# Altium PCB Planar_HB_2.PcbDoc
Units mm, origin at the board's own origin, x right, y up, seen from the top; angles counter-clockwise.
Board outline 20.05 x 34.23 mm, 4 copper layers (Layer 1, Layer 2, Layer 3, Layer 4), stack 0.603 mm thick; 6 components, 5 nets, 22 pads, 6 vias.
Unrouted connection lines stored in the file: 10.
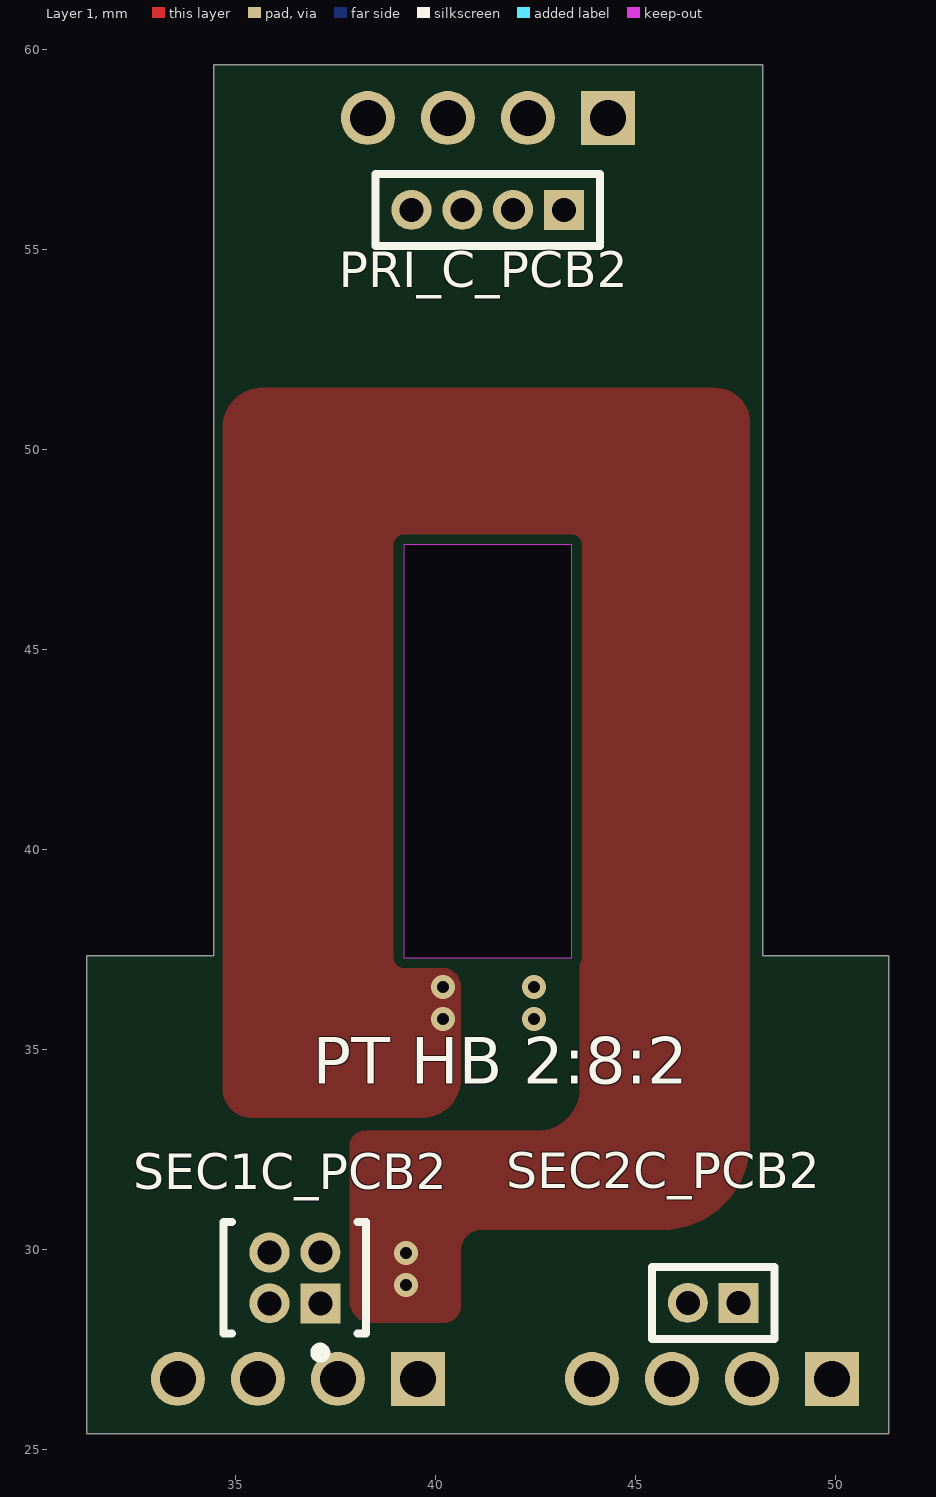
[diagram p0: Layer 1 view]
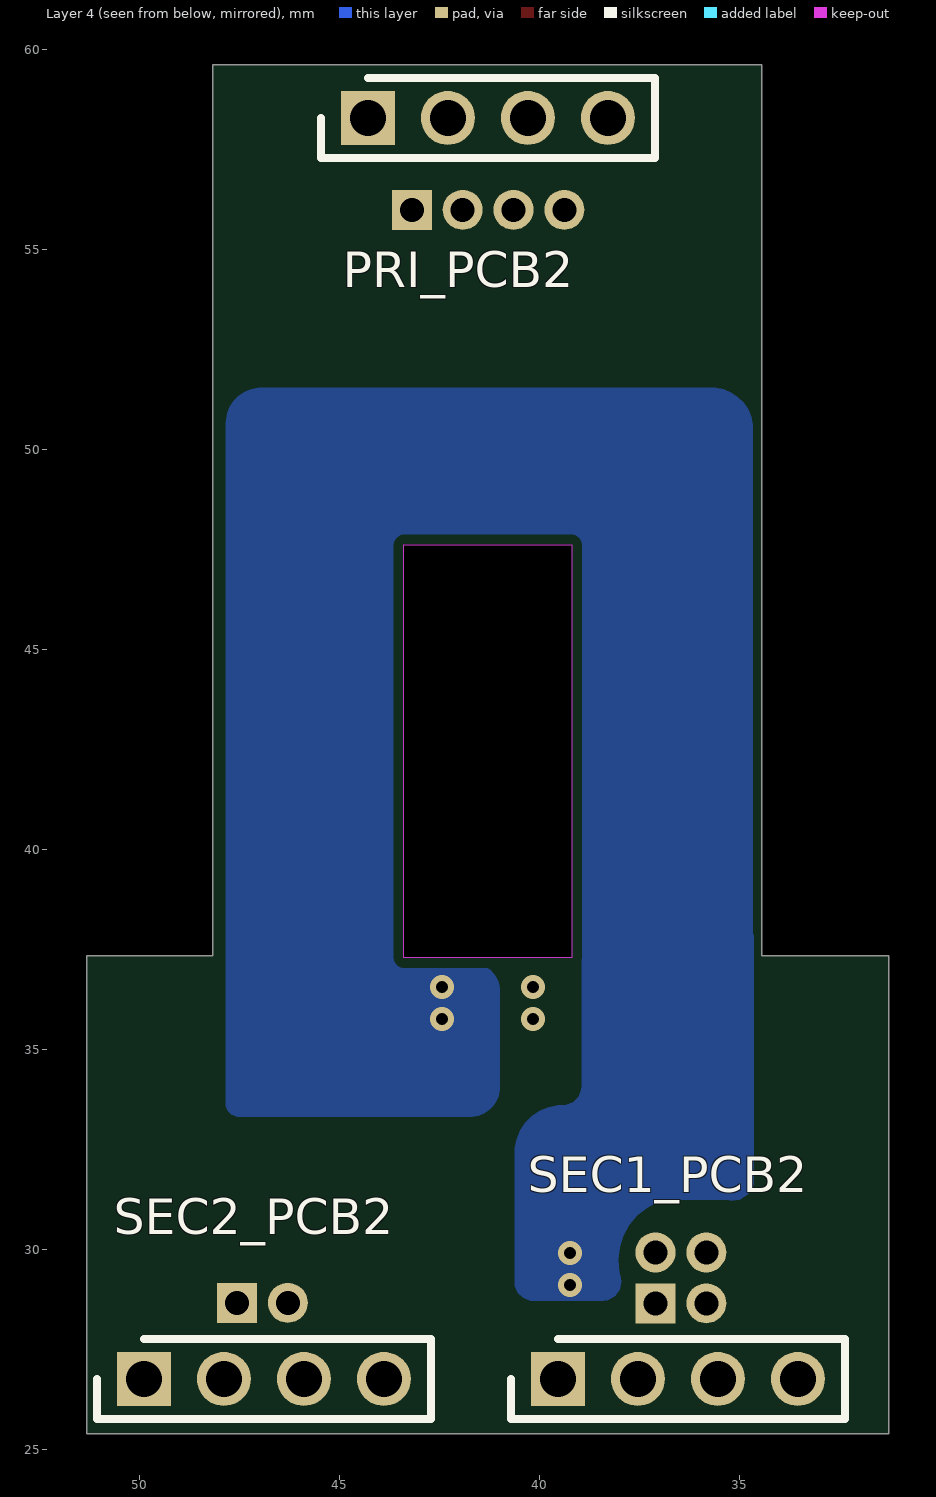
[diagram p1: Layer 4 view, seen from below]
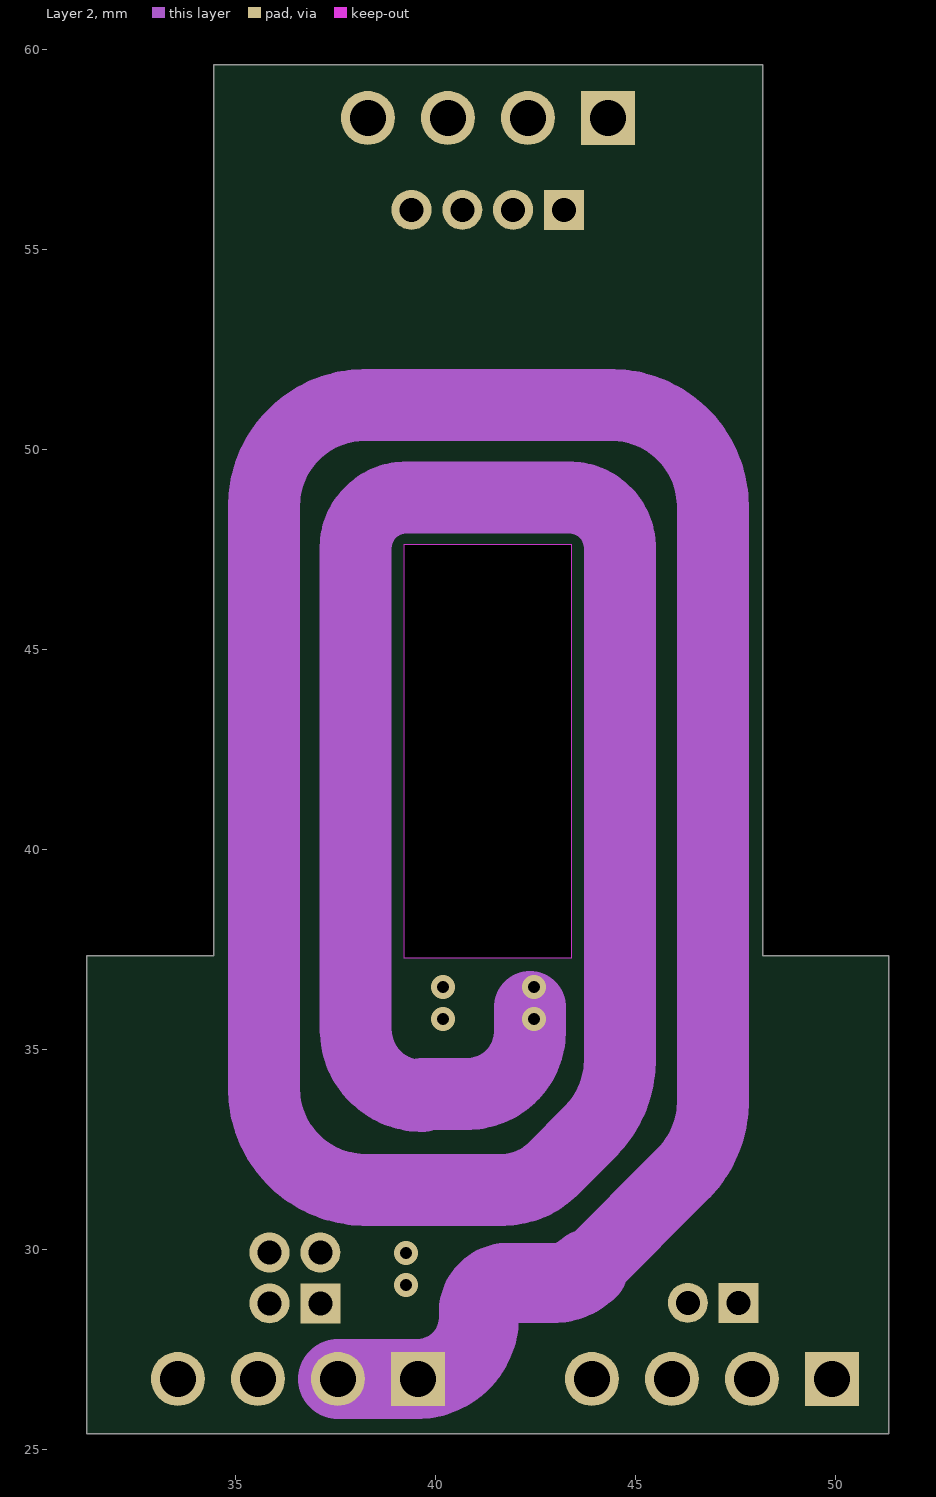
[diagram p2: Layer 2]
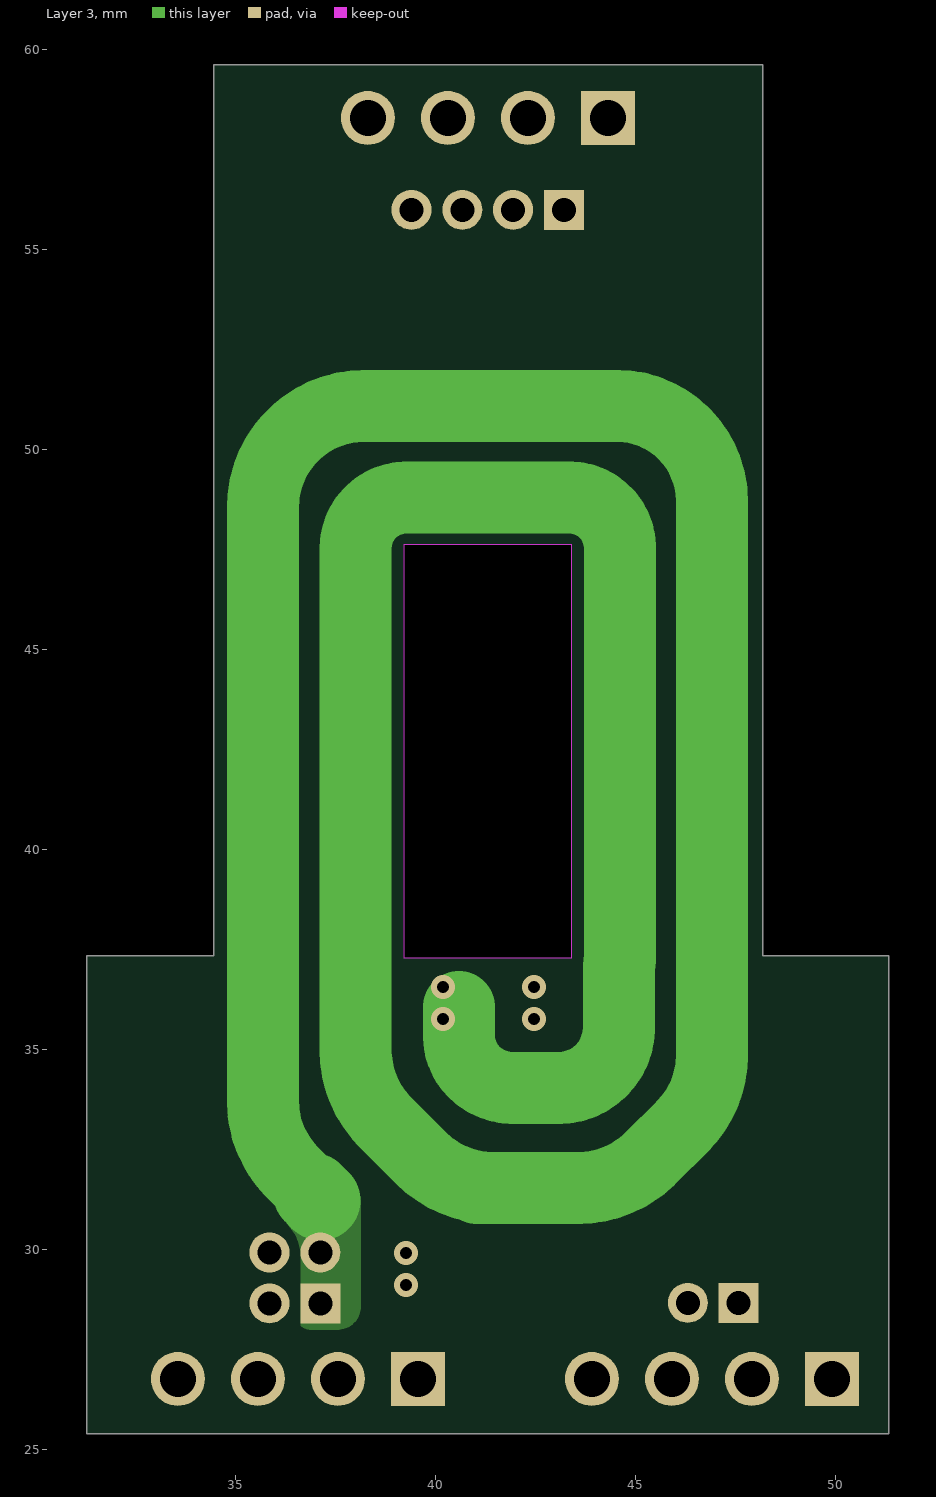
[diagram p3: Layer 3]

## Layer stack, top to bottom
Top Solder: solder mask 0.0102, Solder Resist, Dk 3.5
Layer 1: signal copper 0.0356
Dielectric 2: prepreg 0.0711, PP-006, Dk 4.1
Layer 2: signal copper 0.035
Dielectric 1: dielectric 0.32, FR-4, Dk 4.8
Layer 3: signal copper 0.035
Dielectric 3: prepreg 0.0711, PP-006, Dk 4.1
Layer 4: signal copper 0.0356
Bottom Solder: solder mask 0.0102, Solder Resist, Dk 3.5

## Board outline
31.275,25.4 31.275,37.35 34.45,37.35 34.45,59.625 48.175,59.625 48.175,37.35 51.325,37.35 51.325,25.4
cut-out: 39.2,47.625 39.2,37.3 43.4,37.3 43.4,47.625

## Design rules (kind name [scope] priority, off if disabled: settings)
Clearance [All] p1: gap=0.254 ignorepadtopadclearanceinfootprint=FALSE except(0: Arc-Hole Track-Hole SMDPad-Hole THPad-Hole Via-Hole Fill-Hole Poly-Hole Region-Hole Text-Hole)
PlaneConnect [All] p1: planeconnectstyle=Direct reliefexpansion=0.508 reliefentries=4 reliefconductorwidth=0.254 reliefairgap=0.254
PolygonConnect [All] p1: connectstyle=Direct reliefconductorwidth=0.254 reliefentries=4 polygonreliefangle="90 Angle" airgapwidth=0.254
RoutingVias [All] p1: holewidth=0.711 width=1.27 viastyle="Through Hole" minholewidth=0.711 minwidth=1.27 maxholewidth=0.711 maxwidth=1.27
SolderMaskExpansion [All] p1: expansion=0.102 istentingtop=FALSE
Width [All] p1: maxlimit=10 minlimit=0.254 preferedwidth=0.254
29 further rules are at their usual default settings.

## Components (designator, comment, footprint, x,y, rotation, side; value= is the part's Value field where it differs from the comment)
PRI_C_PCB2 "MHDR1X4" MHDR1X4 43.2,56 r180 top locked (schematic designator PRI_C_PCB1)
PRI_PCB2 "M22-2510405" HDRV4W50P0X200_1X4_800X200X525P 44.3,58.3 r180 bottom locked (schematic designator PRI_PCB1)
SEC1_PCB2 "M22-2510405" HDRV4W50P0X200_1X4_800X200X525P 39.55,26.775 r180 bottom locked (schematic designator SEC1_PCB1)
SEC1C_PCB2 "FTS-102-01-L-D" FP-FTS-102-01-L-D-MFG 36.475,29.3 r90 top
SEC2_PCB2 "M22-2510405" HDRV4W50P0X200_1X4_800X200X525P 49.9,26.775 r180 bottom locked (schematic designator SEC2_PCB1)
SEC2C_PCB2 "MHDR1X2" MHDR1X2 47.57,28.675 r180 top locked

## Footprints (in the part's own frame and the unit in brackets; to place one, negate y for a bottom-side part, rotate by r counter-clockwise, add the part's x,y. Pads: shape width x height; smd on the part's side, far side on the other; paste and mask are expansions set on the pad)
FP-FTS-102-01-L-D-MFG [mm]
  rect 1x1 hole 0.6 paste-1000 mask+0: 1(-0.635,-0.635)
  round 1 hole 0.6 paste-1000 mask+0: 2(-0.635,0.635) 3(0.635,-0.635) 4(0.635,0.635)
  silkscreen extent -1.99,-1.78 1.4,1.78, body extent -1.5,-1.88 1.5,1.88, height 0.25
HDRV4W50P0X200_1X4_800X200X525P [mm]
  rect 1.35x1.35 hole 0.9: 1(0,0)
  round 1.35 hole 0.9: 2(2,0) 3(4,0) 4(6,0)
  silkscreen extent -1.18,-1 7.17,1, body extent -1,-1 7,1, height 5.25
MHDR1X2 [mm] "Connector; Header; 2 Position"
  rect 1x1 hole 0.6: 1(0,0)
  round 1 hole 0.6: 2(1.27,0)
  silkscreen extent -0.9,-0.9 2.17,0.9
MHDR1X4 [mm] "Connector; Header; 4 Position"
  rect 1x1 hole 0.6: 1(0,0)
  round 1 hole 0.6: 2(1.27,0) 3(2.54,0) 4(3.81,0)
  silkscreen extent -0.9,-0.9 4.71,0.9

## Part data
PRI_C_PCB2: "Header, 4-Pin", LatestRevisionDate=17-Jul-2002, LatestRevisionNote="Re-released for DXP Platform.", Publisher="Altium Limited"
PRI_PCB2 SEC1_PCB2 SEC2_PCB2: "Connector", Manufacturer_Name=Harwin, Mouser Part Number=855-M22-2510405, Datasheet Link=https://cdn.harwin.com/pdfs/M22-251.pdf, Height=5.25mm, Manufacturer_Part_Number=M22-2510405, Mouser Price/Stock=https://www.mouser.co.uk/ProductDetail/Harwin/M22-2510405?qs=vF78I%252BjhbY9z7PsFZBZ5CA%3D%3D
SEC1C_PCB2: library part CMP-02766-000107-1, "CONN HEADER VERT 4POS 1.27MM", Color=Black, Max Current Rating=1.75A, Max Operating Temperature=125°C, Min Operating Temperature=-55°C, Package Quantity=1, Connector Type="Male Pin", Contact Material=Bronze, Contact Mating Length=0.12inch, Contact Plating=Gold, Depth=3.42mm, Gender=Male, Housing Color=Black, Housing Material=Polymer, Lead Free="Lead Free", Length=2.54mm, Mount="Through Hole", Number of Contacts=4, Number of Positions=4, Number of Rows=2, Orientation=Straight, Packaging=Bulk, Pitch=1.27mm, Radiation Hardening=No, REACH SVHC="No SVHC", Row Spacing=0.05inch, Termination=Solder
SEC2C_PCB2: "Header, 2-Pin", LatestRevisionDate=17-Jul-2002, LatestRevisionNote="Re-released for DXP Platform.", Publisher="Altium Limited"

## Via types
v1: diameter 0.6, hole 0.3, Layer 1 to Layer 4, tented both sides, 6 vias

## Nets (pads, with @x,y where several pads share a name; then routed paths per layer and width w, separated by ;. In a path a pad name is that pad's centre, name@x,y a point inside that pad or via, vN(x,y) a via of type N, cw(c..) or ccw(c..) an arc to the next point about the centre after c; other vN are vias at no path point)
NetPRI_C_PCB1_1: PRI_C_PCB2.1 PRI_C_PCB2.2
P_PCB1: PRI_C_PCB2.3 PRI_C_PCB2.4 PRI_PCB2.3 PRI_PCB2.4
S1_1_PCB1: SEC1_PCB2.1 SEC1_PCB2.2 SEC1_PCB2.3 SEC1_PCB2.4 SEC1C_PCB2.1 SEC1C_PCB2.3 SEC2_PCB2.1 SEC2_PCB2.2 | length 207.1
  Layer 2 w1.8: 42.35,36.075 42.35,35.45 cw(c40.8,35.45) 40.8,33.9 39.7,33.9 ccw(c39.7,33.85) 39.65,33.85 cw(c39.65,35.504) 37.996,35.504 37.996,47.55 cw(c39.25,47.55) 39.25,48.804 43.35,48.804 cw(c43.35,47.55) 44.604,47.55 44.604,34.756 cw(c42.064,34.756) 43.86,32.96 42.925,32.025 cw(c41.658,33.292) 41.658,31.5 38.24,31.5 cw(c38.24,34.04) 35.7,34.04 35.7,48.585 cw(c38.24,48.585) 38.24,51.125 44.385,51.125 cw(c44.385,48.585) 46.925,48.585 46.925,33.702 cw(c44.385,33.702) 46.181,31.906 43.8,29.525
  Layer 2 w2: SEC1_PCB2.2 SEC1_PCB2.1 ccw(c39.55,28.3) 41.075,28.3 41.075,28.45 cw(c41.8,28.45) 41.8,29.175 42.955,29.175 ccw(c42.955,30.37) 43.8,29.525
  Layer 3 w1.8: 36.927,31.423 36.419,31.931 ; 37.125,31.225 36.419,31.931 ; 40.575,36.075 40.575,35.355 ccw(c41.855,35.355) 40.95,34.45 ccw(c41.916,35.416) 41.916,34.05 43.075,34.05 ccw(c43.075,35.55) 44.575,35.55 44.575,36.92 cw(c46.575,36.917) 44.593,37.181 ccw(c43.35,37.35) 44.6,37.25 ccw(c43.35,37.35) 44.604,37.35 44.604,47.55 ccw(c43.35,47.55) 43.35,48.804 39.25,48.804 ccw(c39.25,47.55) 38.363,48.437 ccw(c39.25,47.55) 37.996,47.55 37.996,34.981 ccw(c40.536,34.981) 38.74,33.185 39.631,32.294 ccw(c41.427,34.09) 41.427,31.55 ; 41.03,31.55 41.427,31.55 ; 36.419,31.931 cw(c38.215,33.727) 35.675,33.727 35.675,48.56 cw(c38.215,48.56) 38.215,51.1 44.525,51.1 cw(c44.525,48.725) 46.9,48.725 46.9,34.85 cw(c44.425,34.85) 46.175,33.1 45.369,32.294 cw(c43.573,34.09) 43.573,31.55 41.427,31.55
  Layer 3 w2: 36.927,31.423 cw(c35.135,29.623) 37.029,31.315 ccw(c38.517,32.651) 37.112,31.229
  other v1: 39.25,29.125 39.25,29.925 40.175,35.775 42.45,35.775 40.175,36.575 42.45,36.575
S1_2_PCB1: SEC2_PCB2.3 SEC2_PCB2.4
S2_1_PCB1: SEC2C_PCB2.1 SEC2C_PCB2.2
pads on no net: PRI_PCB2.1 PRI_PCB2.2 SEC1C_PCB2.2 SEC1C_PCB2.4

## Polygon pours and split planes (outlines as drawn)
S1_1_PCB1 on Layer 4 "NONET_L-01_P-001" (solid, pour order 7): 38.95,37.925 38.95,34.1 ccw(c39.437,34.1) 39.437,33.612 cw(c39.437,32.425) 40.625,32.425 40.625,29.2 cw(c40.15,29.2) 40.15,28.725 38.4,28.725 cw(c38.475,29.225) 37.975,29.3 ccw(c36.463,29.738) 36.9,31.25 35.325,31.25 cw(c35.195,31.787) 34.658,31.658 34.658,37.875
S1_1_PCB1 on Layer 4 "NONET_L-01_P-001" (solid, remove dead copper, pour order 1): 41.675,37.15 43.35,37.15 ccw(c43.35,37.375) 43.575,37.375 43.575,47.575 ccw(c43.275,47.575) 43.275,47.875 39.4,47.875 ccw(c39.4,47.425) 38.95,47.425 38.95,35.075 cw(c37.275,35) 37.35,33.325 36.075,33.325 cw(c36.25,34.9) 34.675,35.075 34.675,50.525 cw(c35.7,50.525) 35.7,51.55 46.95,51.55 cw(c46.95,50.65) 47.85,50.65 47.85,33.675 cw(c47.5,33.675) 47.5,33.325 41.75,33.325 cw(c41.75,34.075) 41,34.075 41,36.475 cw(c41.675,36.475)
S1_1_PCB1 on Layer 1 "NONET_L-01_P-001" (solid, remove dead copper, pour order 9): 40.2,28.175 ccw(c40.2,28.6) 40.625,28.6 40.625,30 cw(c41.125,30) 41.125,30.5 45.65,30.5 ccw(c45.65,32.7) 47.85,32.7 47.85,50.675 ccw(c46.975,50.675) 46.975,51.55 35.675,51.55 ccw(c35.675,50.55) 34.675,50.55 34.675,34.025 ccw(c35.4,34.025) 35.4,33.3 39.65,33.3 ccw(c39.65,34.275) 40.625,34.275 40.625,36.55 ccw(c40.1,36.55) 40.1,37.075 39.25,37.075 cw(c39.25,37.325) 39,37.325 39,47.55 cw(c39.25,47.55) 39.25,47.8 43.325,47.8 cw(c43.325,47.525) 43.6,47.525 43.6,34.025 cw(c42.55,34.025) 42.55,32.975 38.225,32.975 ccw(c38.225,32.6) 37.85,32.6 37.85,28.725 ccw(c38.4,28.725) 38.4,28.175
S1_1_PCB1 on Layer 3 "NONET_L-01_P-001" (solid, remove dead copper, pour order 10): 36.3,30.625 cw(c35.515,29.84) 36.625,29.84 36.625,28.1 ccw(c36.866,28.341) 36.866,28 37.528,28 ccw(c37.528,28.597) 37.95,28.175 ccw(c37.528,28.597) 38.125,28.597 38.125,31.1 ccw(c36.858,31.1) 37.754,31.996 37.675,32.075

## Silkscreen, mask and mechanical layers (free items; w line width, h text height)
Top Overlay:
  text "PT HB 2:8:2" at 36.925,33.771 h2
Mechanical 1:
  lines w0.2: 31.325,25.4 51.325,25.4 51.325,37.35 48.175,37.35 48.175,59.625 34.45,59.625 34.45,37.35 31.325,37.35 31.325,25.4 ; 39.24,37.341 43.39,37.341 43.39,47.591 39.24,47.591 39.24,37.341